# Altium PCB PCB_rectifier_updated.PcbDoc
Units mm, origin at the board's own origin, x right, y up, seen from the top; angles counter-clockwise.
Board outline 65 x 20 mm, 2 copper layers (Top Layer, Bottom Layer); 9 components, 5 nets, 18 pads, 0 vias.
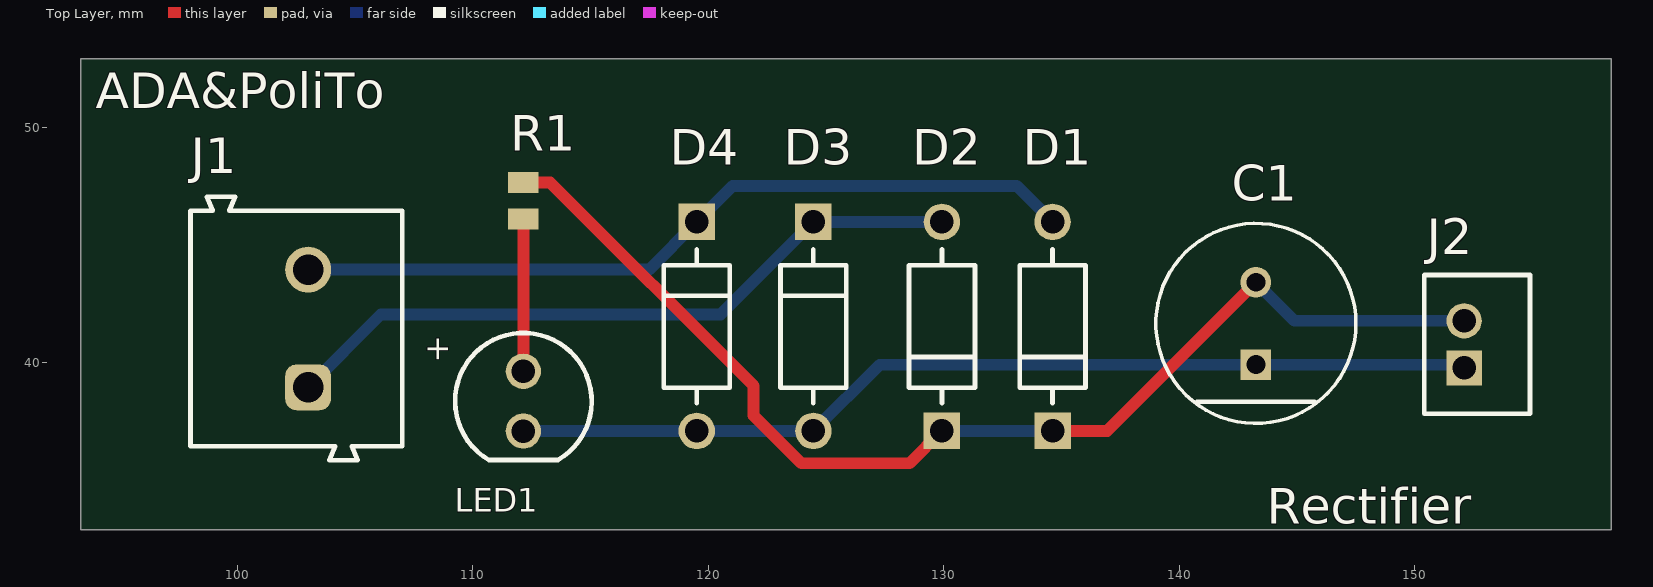
[diagram p0: Top Layer view]
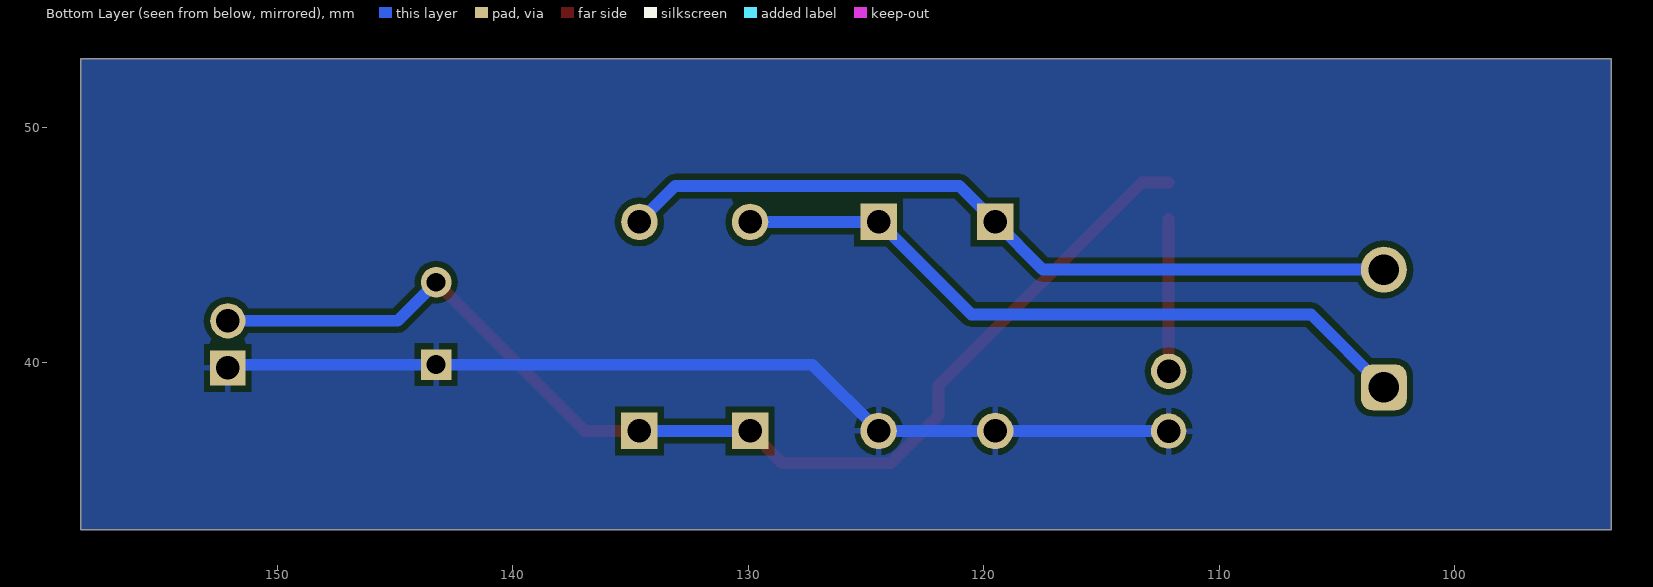
[diagram p1: Bottom Layer view, seen from below]

## Layer stack, top to bottom
Top Solder: solder mask 0.0102, Solder Resist, Dk 3.5
Top Layer: signal copper 0.0356
Dielectric 1: dielectric 0.32, FR-4, Dk 4.8
Bottom Layer: signal copper 0.0356
Bottom Solder: solder mask 0.0102, Solder Resist, Dk 3.5

## Board outline
93.345,32.893 93.345,52.893 158.345,52.893 158.345,32.893

## Design rules (kind name [scope] priority, off if disabled: settings)
Clearance [All] p1: gap=0.254 ignorepadtopadclearanceinfootprint=FALSE
PolygonConnect [All] p1: connectstyle=Relief reliefconductorwidth=0.254 reliefentries=4 polygonreliefangle="90 Angle" airgapwidth=0.254
RoutingVias [All] p1: holewidth=0.711 width=1.27 viastyle="Through Hole" minholewidth=0.711 minwidth=1.27 maxholewidth=0.711 maxwidth=1.27
SolderMaskExpansion [All] p1: expansion=0 istentingtop=FALSE
SupplyNets "Schematic Supply Nets" [InNet('GND')] p1: voltage=0.000
Width [All] p1: maxlimit=1 minlimit=0.254 preferedwidth=0.254
30 further rules are at their usual default settings.

## Components (designator, comment, footprint, x,y, rotation, side; value= is the part's Value field where it differs from the comment)
C1 "EEUFR1H101" FP-RAD-TH-D_8_0_5-L_11_5-MFG 143.256,41.656 r90 top
D1 "1N4007" FP-1N4007-MFG 134.62,41.529 r90 top value=15pF
D2 "1N4007" FP-1N4007-MFG 129.921,41.529 r90 top value=15pF
D3 "1N4007" FP-1N4007-MFG 124.46,41.529 r270 top value=15pF
D4 "1N4007" FP-1N4007-MFG 119.507,41.529 r270 top value=15pF
J1 "691101710002" 691101710002 -1167.503,1311.442 r90 top
J2 "B2B-PH-K-S(LF)(SN)" JST-B2B-PH-K-S_V 152.654,40.767 r90 top
LED1 "15400585A3590" WL-TIRW_D5.8H8.6 112.141,38.354 r270 top
R1 "TNPW08051K00BEEN" RESC2013X55X40LL15T20 112.141,46.863 r90 top

## Footprints (in the part's own frame and the unit in brackets; to place one, negate y for a bottom-side part, rotate by r counter-clockwise, add the part's x,y. Pads: shape width x height; smd on the part's side, far side on the other; paste and mask are expansions set on the pad)
691101710002 [mm] "5,00mm - modular - blue - Horizontal entry with pressure clamp - 12,6mm height - 02p"
  rrect50% 1.95x1.95 hole 1.3: 1(-1272.5,-1270.5)
  round 1.95 hole 1.3: 2(-1267.5,-1270.5)
  silkscreen extent -1275.6,-1274.5 -1264.4,-1265.5, body extent -1275.6,-1274.5 -1264.4,-1265.5, height 12.65
FP-1N4007-MFG [mm]
  rect 1.55x1.55 hole 1 paste-2539.97 mask+0: 1(-4.44,0)
  round 1.55 hole 1 paste-2539.97 mask+0: 2(4.44,0)
  silkscreen extent -3.27,-1.4 3.27,1.4, body extent -5.32,-1.5 5.32,1.5, height 0.25
FP-RAD-TH-D_8_0_5-L_11_5-MFG [mm]
  rect 1.3x1.3 hole 0.8 paste-2539.97 mask+0: 1(-1.75,0)
  round 1.3 hole 0.8 paste-2539.97 mask+0: 2(1.75,0)
  silkscreen extent -4.25,-4.25 4.25,4.25, body extent -4.35,-4.35 4.35,4.35, height 0.25
JST-B2B-PH-K-S_V [mm] "Connector, 2-Leads, Body 5.9x4.5mm, Pitch 2mm"
  rect 1.5x1.5 hole 1: 1(-1,0.55)
  round 1.5 hole 1: 2(1,0.55)
  silkscreen extent -2.95,-2.25 2.95,2.25, body extent -2.95,-2.25 2.95,2.25, height 6
RESC2013X55X40LL15T20 [mm] "Chip Resistor, 2-Leads, Body 2.00x1.25mm, IPC High Density"
  rect 0.9x1.3 smd: 1(-0.775,0) 2(0.775,0)
  body extent -1.07,-0.7 1.07,0.7, height 0.55
WL-TIRW_D5.8H8.6 [mm] "THT Infrared Round Waterclear, body diameter 5.8mm"
  round 1.5 hole 1: 1(1.27,0) 2(-1.27,0)
  silkscreen extent -2.9,-2.9 2.5,2.9, body extent -2.9,-2.9 2.5,2.9, height 9.1

## Part data
C1: library part CMP-05427-002079-1, "Aluminum Electrolytic Capacitors (Radial Lead Type) 100uF ±20% 50V", Capacitance=100uF, Case/Package=Radial, ESR (Equivalent Series Resistance)=61mR, Max Operating Temperature=105°C, Min Operating Temperature=-40°C, Package Quantity=200, Ripple Current=870mA, Tolerance=20%, Voltage=50V, Construction=RADIAL, Contact Plating=Tin, Diameter=8mm, Height=11.5mm, Height - Seated (Max)=0.512inch, Impedance=61mR, Lead Diameter=0.6mm, Lead Pitch=3.5mm, Lead/Base Style=Straight, Length=11.5mm, Life (Hours)=6000Hour, Mount="Through Hole", Number of Pins=2, Packaging=Bulk, Radiation Hardening=No, REACH SVHC="No SVHC", Ripple Current (AC)=870mA, RoHS Compliant=Yes, Series=FR, Termination=Radial, Voltage Rating=50V, Voltage Rating (DC)=50V
D1 D2 D3 D4: library part CMP-123542-000001-1, "Rectifier diode 1000 V 1 A DO-41, ,", Capacitance=15pF, Forward Current=1A, Manufacturer=Diotec, Max Junction Temp=+175°C, Max Repetitive Reverse Voltage=1000V, Max Surge Forward Current=27A, Peak Reverse Current=5uA, Temperature="-50°C to +175°C", Temperature Range Low=-50°C, Automotive=No, Category=Diode, ComponentLink2Description=Datasheet, ComponentLink2URL=https://datasheet.octopart.com/1N4007-Diotec-datasheet-62346875.pdf, Device Class L1="Discrete Semiconductors", Device Class L2=Diodes, Device Class L3="Rectifier Diodes", Height=2.8mm, Ipc Land Pattern Name=DIOAD888W100L520D280, Lead Free=Yes, Manufacturer Part Number=1N4007, Octopart=https://octopart.com/1n4007-diotec-4040411, Package=1N4007, Reverse Voltage=1000V, RoHS=TRUE, Temperature Range High=+175°C
J1: library part CMP-1502-03256-3, "Conn Terminal Block 2 POS 5mm Solder ST Thru-Hole 16A Box", Color=Blue, Current=16A, Max Operating Temperature=105°C, Min Operating Temperature=-40°C, Voltage=250V, Contact Material=Brass, Contact Plating=Tin, Current Rating=16A, Height=12.8mm, Housing Material=Nylon, Lead Pitch=5mm, Length=9mm, Mount="Through Hole", Number of Contacts=2, Number of Levels=1, Number of Pins=2, Number of Positions Per Level=2, Number of Rows=1, Packaging=Box, Pitch=5.0038mm, Plating=Steel, RoHS=Compliant, Stripping Length=-7mm, Termination=Screw, Voltage Rating=250V, Width=11.2mm, Wire Gauge (Max)=26AWG, Wire Gauge (Min)=14AWG, Wire/Cable Gauge=26AWG
J2: library part CMP-2000-05162-1, "Male Header, Pitch 2 mm, 1 x 2 Position, Height 6 mm, Tail Length 3.4 mm, -25 to 85 degC, RoHS, Bulk", Manufacturer=JST, Datasheet URL=http://datasheet.octopart.com/B2B-PH-K-S%28LF%29%28SN%29-JST-datasheet-8324864.pdf, Datasheet Version=Nov-08, Manufacturer URL=http://www.jst.com/home2.html, No of Positions=2, Pitch=2mm, Style/Orientation=StraightHeader/Plug, Termination=Crimp, Type=ShroudedHeader
LED1: library part CMP-03913-82270985-2, "WL-TIRW THT Infrared Round Waterclear", Forward Current=1A, Forward Voltage=1.5V, Max Reverse Voltage (DC)=5V, Packaging=Bulk, Peak Wavelength=850nm, RoHS=Compliant, Viewing Angle=35°, Wavelength=850nm
R1: library part CMP-2001-04738-1, Manufacturer="Vishay Dale", Part Number=TNPW08051K00BEEN

## Nets (pads, with @x,y where several pads share a name; then routed paths per layer and width w, separated by ;. In a path a pad name is that pad's centre, name@x,y a point inside that pad or via, vN(x,y) a via of type N, cw(c..) or ccw(c..) an arc to the next point about the centre after c; other vN are vias at no path point)
GND: C1.1 D3.2 D4.2 J2.1 LED1.1 | length 41.2
  Bottom Layer w0.5: LED1.1 115.799,37.084 115.804,37.089 D4.2 D3.2 127.277,39.906 C1.1 151.965,39.906 J2.1
NetC1_2: C1.2 D1.1 D2.1 J2.2 R1.2 | length 49.5
  Top Layer w0.5: R1.2 113.284,47.638 121.92,39.002 121.92,37.744 123.952,35.712 128.544,35.712 D2.1 ; D1.1 136.939,37.089 C1.2
  Bottom Layer w0.5: D2.1 D1.1 ; C1.2 144.895,41.767 J2.2
NetD1_2: D1.2 D4.1 J1.2 | length 33.7
  Bottom Layer w0.5: J1.2 117.48,43.942 D4.1 121.036,47.498 133.091,47.498 D1.2
NetD2_2: D2.2 D3.1 J1.1 | length 29.8
  Bottom Layer w0.5: J1.1 106.092,42.037 120.528,42.037 D3.1 D2.2
NetLED1_2: LED1.2 R1.1 | length 6.5
  Top Layer w0.5: LED1.2 R1.1

## Polygon pours and split planes (outlines as drawn)
GND on Bottom Layer "GND_L02_P000" (solid, remove dead copper, pour order 0): 93.345,32.893 93.345,52.893 158.345,52.893 158.345,32.893

## Silkscreen, mask and mechanical layers (free items; w line width, h text height)
Top Overlay:
  text "ADA&PoliTo" at 93.98,50.8 h1.52
  text "Rectifier" at 143.709,33.147 h1.52
Mechanical 1:
  the board outline again, w0.254

## Text inside footprints (layer, text, board x,y; h text height)
LED1: Top Overlay "+" at 108.077,41.148 h1.02 r270